# EAGLE board CT_schematic (EAGLE 7.6.0)

Size 100 x 80 mm. Coordinates in mm from the lower left corner, seen from the top.
Outline: 0,0 100,0 100,80 0,80 0,0
Copper layers (1*16): Top 0.035mm / dielectric 1.5mm / Bottom 0.035mm
Design rules "default": minimum track width 10mil, minimum drill 24mil, track to track 8mil, track to pad 8mil, pad to pad 8mil, via to via 8mil, smd to smd 8mil, copper to edge 40mil, drill to drill 8mil, minimum pad ring 10mil, minimum via ring 8mil, stop-mask expansion 4mil, vias tented up to drill 0mil, thermal gap 10mil

## Footprints (pad centres in the part's own frame; a part is rotated, then mirrored left to right if it is on the bottom)
C0603 = smd 0.8 x 0.8: 1 -0.762,0; 2 0.762,0
C0402 = smd 0.5 x 0.5: 1 -0.508,0; 2 0.508,0
2220 = smd 1.85 x 5.5: 1 -2.55,0; 2 2.55,0
C1210 = smd 1.2 x 2.5: 1 -1.524,0; 2 1.524,0
C1206 = smd 1.3 x 1.6: 1 -1.524,0; 2 1.524,0
L0603 = smd 0.8 x 0.8: 1 -0.762,0; 2 0.762,0
R0603 = smd 0.8 x 0.8: 1 -0.762,0; 2 0.762,0
LQFP100 = smd 0.3 x 1.2: 1 -6,-7.75; 2 -5.5,-7.75; 3 -5,-7.75; 4 -4.5,-7.75; 5 -4,-7.75; 6 -3.5,-7.75; 7 -3,-7.75; 8 -2.5,-7.75; 9 -2,-7.75; 10 -1.5,-7.75; 11 -1,-7.75; 12 -0.5,-7.75; 13 0,-7.75; 14 0.5,-7.75; 15 1,-7.75; 16 1.5,-7.75; 17 2,-7.75; 18 2.5,-7.75; 19 3,-7.75; 20 3.5,-7.75; 21 4,-7.75; 22 4.5,-7.75; 23 5,-7.75; 24 5.5,-7.75; 25 6,-7.75; 51 6,7.75; 52 5.5,7.75; 53 5,7.75; 54 4.5,7.75; 55 4,7.75; 56 3.5,7.75; 57 3,7.75; 58 2.5,7.75; 59 2,7.75; 60 1.5,7.75; 61 1,7.75; 62 0.5,7.75; 63 0,7.75; 64 -0.5,7.75; 65 -1,7.75; 66 -1.5,7.75; 67 -2,7.75; 68 -2.5,7.75; 69 -3,7.75; 70 -3.5,7.75; 71 -4,7.75; 72 -4.5,7.75; 73 -5,7.75; 74 -5.5,7.75; 75 -6,7.75 | smd 1.2 x 0.3: 26 7.75,-6; 27 7.75,-5.5; 28 7.75,-5; 29 7.75,-4.5; 30 7.75,-4; 31 7.75,-3.5; 32 7.75,-3; 33 7.75,-2.5; 34 7.75,-2; 35 7.75,-1.5; 36 7.75,-1; 37 7.75,-0.5; 38 7.75,0; 39 7.75,0.5; 40 7.75,1; 41 7.75,1.5; 42 7.75,2; 43 7.75,2.5; 44 7.75,3; 45 7.75,3.5; 46 7.75,4; 47 7.75,4.5; 48 7.75,5; 49 7.75,5.5; 50 7.75,6; 76 -7.75,6; 77 -7.75,5.5; 78 -7.75,5; 79 -7.75,4.5; 80 -7.75,4; 81 -7.75,3.5; 82 -7.75,3; 83 -7.75,2.5; 84 -7.75,2; 85 -7.75,1.5; 86 -7.75,1; 87 -7.75,0.5; 88 -7.75,0; 89 -7.75,-0.5; 90 -7.75,-1; 91 -7.75,-1.5; 92 -7.75,-2; 93 -7.75,-2.5; 94 -7.75,-3; 95 -7.75,-3.5; 96 -7.75,-4; 97 -7.75,-4.5; 98 -7.75,-5; 99 -7.75,-5.5; 100 -7.75,-6
SOIC-8 = smd 1.6 x 0.6: 1 -2.7,1.905 | smd 1.55 x 0.6: 2 -2.7,0.635; 3 -2.7,-0.635; 4 -2.7,-1.905; 5 2.7,-1.905; 6 2.7,-0.635; 7 2.7,0.635; 8 2.7,1.905
TDFN-8/6MM = smd 0.3 x 0.75: 1 0,0; 2 0.5,0; 3 1,0; 4 1.5,0; 5 1.5,3; 6 1,3; 7 0.5,3; 8 0,3
SON-8 = smd 0.35 x 0.85: 1 -0.975,-1.475; 2 -0.325,-1.475; 3 0.325,-1.475; 4 0.975,-1.475; 5 0.975,1.475; 6 0.325,1.475; 7 -0.325,1.475; 8 -0.975,1.475 | smd 2.4 x 1.65: PAD 0,0
QFN-32 = smd 0.6 x 0.3: 1 -2.3,1.75; 2 -2.3,1.25; 3 -2.3,0.75; 4 -2.3,0.25; 5 -2.3,-0.25; 6 -2.3,-0.75; 7 -2.3,-1.25; 8 -2.3,-1.75; 17 2.3,-1.75; 18 2.3,-1.25; 19 2.3,-0.75; 20 2.3,-0.25; 21 2.3,0.25; 22 2.3,0.75; 23 2.3,1.25; 24 2.3,1.75 | smd 0.3 x 0.6: 9 -1.75,-2.3; 10 -1.25,-2.3; 11 -0.75,-2.3; 12 -0.25,-2.3; 13 0.25,-2.3; 14 0.75,-2.3; 15 1.25,-2.3; 16 1.75,-2.3; 25 1.75,2.3; 26 1.25,2.3; 27 0.75,2.3; 28 0.25,2.3; 29 -0.25,2.3; 30 -0.75,2.3; 31 -1.25,2.3; 32 -1.75,2.3 | smd 3.2 x 3.2: EXP 0,0
SJ-43515TS-SMT-TR = smd 2.2 x 3: 1 0.6,-7.4; 4 3.4,-7.4 | smd 3 x 3: 2 12.8,-7.4; 5 17,-3 | smd 2 x 3: 3 5.3,0; 6 2.5,0 | drill 1.8: P$7 4.5,-3.69; P$8 11.54,-3.69
WM-64PC = drill 0.6 pad 1: 1 -1,0.95; 2 -1,-0.95
FCI_10118193-0001LF = smd 0.4 x 1.35: 1 -1.3,2.675; 2 -0.65,2.675; 3 0,2.675; 4 0.65,2.675; 5 1.3,2.675 | smd 1.6 x 1.4: 6 -3.2,2.45; 7 3.2,2.45 | smd 1.9 x 1.9: 8 -1.2,0; 9 1.2,0 | hole 0.5: -3.3,0; 3.3,0
SOT143B = smd 1 x 0.7: 1 -0.75,-1 | smd 0.6 x 0.7: 2 0.95,-1; 3 0.95,1; 4 -0.95,1
QFN-24 = smd 0.7 x 0.305: 1 -1.815,1.25; 2 -1.815,0.75; 3 -1.815,0.25; 4 -1.815,-0.25; 5 -1.815,-0.73; 6 -1.815,-1.25; 13 1.815,-1.25; 14 1.815,-0.75; 15 1.815,-0.25; 16 1.815,0.25; 17 1.815,0.75; 18 1.815,1.25 | smd 0.305 x 0.7: 7 -1.25,-1.815; 8 -0.75,-1.815; 9 -0.25,-1.815; 10 0.25,-1.815; 11 0.75,-1.815; 12 1.25,-1.815; 19 1.25,1.815; 20 0.75,1.815; 21 0.25,1.815; 22 -0.25,1.815; 23 -0.75,1.815; 24 -1.25,1.815 | smd 2.591 x 2.591: 25 0,0
ABS07-32.768KHZ-7-T = smd 1.1 x 2.4: 1 -2.5,0; 2 0,0
ASFL1 = smd 1.7 x 1.5: 1 -1.27,-1.1; 2 1.27,-1.1; 3 1.27,1.1; 4 -1.27,1.1
MSOP-8_EP = smd 1.422 x 0.508: 1 -2.095,0.975; 2 -2.095,0.325; 3 -2.095,-0.325; 4 -2.095,-0.975; 5 2.095,-0.975; 6 2.095,-0.325; 7 2.095,0.325; 8 2.095,0.975 | smd 1.727 x 1.702: EPAD 0,0
SOIC-8_EP = smd 1.6 x 0.533: 1 -2.921,1.905; 2 -2.921,0.635; 3 -2.921,-0.635; 4 -2.921,-1.905; 5 2.921,-1.905; 6 2.921,-0.635; 7 2.921,0.635; 8 2.921,1.905 | smd 2.54 x 3.302: EPAD 0,0 | drill 0.406 pad 0.406: P$1 -0.508,0.635; P$2 0.381,0.635; P$3 -0.508,-0.635; P$4 0.381,-0.635
DFN8_2X3MC = smd 0.813 x 0.305: 1 -1.398,0.75; 2 -1.398,0.25; 3 -1.398,-0.25; 4 -1.398,-0.75; 5 1.398,-0.75; 6 1.398,-0.25; 7 1.398,0.25; 8 1.398,0.75 | smd 1.753 x 1.549: 9 0,0
JST-2-SMD = smd 1 x 4.6: 1 -1,-3.7; 2 1,-3.7 | smd 1.6 x 3.4: NC1 -3.4,1.5; NC2 3.4,1.5
SON-6 = smd 0.55 x 0.3: 1 -0.355,0.5 | smd 0.52 x 0.3: 2 -0.37,0; 3 -0.37,-0.5; 4 0.37,-0.5; 5 0.37,0; 6 0.37,0.5
SW_4-1437565-2 = smd 1.4 x 2.1: 1 -2.23,4.55; 2 -2.23,-4.55; 3 2.23,4.55; 4 2.23,-4.55
LGM67K-G1J2-24-Z = smd 0.8 x 1.4: A -2,0; C 0,0
NC7SZ125M5X = smd 1.3 x 0.7: 1 -1.3,0.95; 2 -1.3,0; 3 -1.3,-0.95; 4 1.3,-0.95; 5 1.3,0.95

## Placement (x,y rotation side)
C1  1e-06  [C0603]  -39.37,74.93 0 top  (outside the outline)
C2  1e-07  [C0603]  -43.18,74.93 0 top  (outside the outline)
C3  1e-07  [C0603]  -46.99,74.93 0 top  (outside the outline)
C4  1e-07  [C0603]  -50.8,74.93 0 top  (outside the outline)
C5  1e-07  [C0603]  -54.61,74.93 0 top  (outside the outline)
C6  1e-07  [C0603]  -58.42,74.93 0 top  (outside the outline)
C7  1e-07  [C0603]  -62.23,74.93 0 top  (outside the outline)
C8  4.7e-06  [C0603]  -24.13,74.93 0 top  (outside the outline)
C9  2.2e-06  [C0603]  -27.94,74.93 0 top  (outside the outline)
C10  2.2e-06  [C0603]  -31.75,74.93 0 top  (outside the outline)
C11  1e-08  [C0603]  -66.04,74.93 0 top  (outside the outline)
C12  1e-06  [C0603]  -69.85,74.93 0 top  (outside the outline)
C13  1e-11  [C0402]  -26.67,85.09 0 top  (outside the outline)
C14  1e-11  [C0402]  -30.48,85.09 0 top  (outside the outline)
C15  1e-06  [C0603]  -73.66,74.93 0 top  (outside the outline)
C16  1e-08  [C0402]  -34.29,85.09 0 top  (outside the outline)
C17  1e-08  [C0402]  -38.1,85.09 0 top  (outside the outline)
C18  1e-07  [C0402]  -41.91,85.09 0 top  (outside the outline)
C19  1e-06  [C0603]  -77.47,74.93 0 top  (outside the outline)
C20  1e-06  [C0603]  -81.28,74.93 0 top  (outside the outline)
C21  1e-06  [C0603]  -85.09,74.93 0 top  (outside the outline)
C22  1e-06  [C0603]  -15.24,80.01 0 top  (outside the outline)
C23  1e-06  [C0603]  -19.05,80.01 0 top  (outside the outline)
C24  1e-06  [C0603]  -22.86,80.01 0 top  (outside the outline)
C25  1e-06  [C0603]  -26.67,80.01 0 top  (outside the outline)
C26  1e-07  [C0402]  -45.72,85.09 0 top  (outside the outline)
C27  1e-07  [C0402]  -49.53,85.09 0 top  (outside the outline)
C28  1e-07  [C0402]  -53.34,85.09 0 top  (outside the outline)
C29  1e-07  [C0402]  -57.15,85.09 0 top  (outside the outline)
C30  1e-06  [C0603]  -30.48,80.01 0 top  (outside the outline)
C31  1e-08  [C0402]  -60.96,85.09 0 top  (outside the outline)
C32  2.2e-06  [C0603]  -35.56,74.93 0 top  (outside the outline)
C33  1e-08  [C0402]  -64.77,85.09 0 top  (outside the outline)
C34  1e-08  [C0402]  -68.58,85.09 0 top  (outside the outline)
C35  1e-06  [C0603]  -34.29,80.01 0 top  (outside the outline)
C36  1e-08  [C0402]  -72.39,85.09 0 top  (outside the outline)
C37  1e-08  [C0402]  -76.2,85.09 0 top  (outside the outline)
C38  1e-08  [C0402]  -80.01,85.09 0 top  (outside the outline)
C39  6.8e-05  [2220]  -16.51,46.99 0 top  (outside the outline)
C40  1e-06  [C0603]  -38.1,80.01 0 top  (outside the outline)
C41  6.8e-05  [2220]  -24.13,46.99 0 top  (outside the outline)
C42  1e-05  [C1210]  -40.64,63.5 0 top  (outside the outline)
C43  1e-05  [C1210]  -46.99,63.5 0 top  (outside the outline)
C44  1e-05  [C1210]  -53.34,63.5 0 top  (outside the outline)
C45  1e-05  [C1210]  -59.69,63.5 0 top  (outside the outline)
C46  1e-07  [C0402]  -83.82,85.09 0 top  (outside the outline)
C47  1e-05  [C1206]  -66.04,63.5 0 top  (outside the outline)
C48  1e-05  [C1206]  -72.39,63.5 0 top  (outside the outline)
C49  1e-08  [C0402]  -15.24,90.17 0 top  (outside the outline)
C50  1e-08  [C0402]  -19.05,90.17 0 top  (outside the outline)
F1  240.0  [L0603]  -41.91,80.01 0 top  (outside the outline)
R2  1000.0  [R0603]  -45.72,80.01 0 top  (outside the outline)
R4  4700.0  [R0603]  -49.53,80.01 0 top  (outside the outline)
R5  4700.0  [R0603]  -53.34,80.01 0 top  (outside the outline)
R6  2200.0  [R0603]  -57.15,80.01 0 top  (outside the outline)
R7  2200.0  [R0603]  -60.96,80.01 0 top  (outside the outline)
R8  2200.0  [R0603]  -64.77,80.01 0 top  (outside the outline)
R9  2200.0  [R0603]  -68.58,80.01 0 top  (outside the outline)
R10  10000.0  [R0603]  -46.99,69.85 0 top  (outside the outline)
R11  10000.0  [R0603]  -52.07,69.85 0 top  (outside the outline)
R12  10000.0  [R0603]  -57.15,69.85 0 top  (outside the outline)
R13  10000.0  [R0603]  -62.23,69.85 0 top  (outside the outline)
R14  10000.0  [R0603]  -67.31,69.85 0 top  (outside the outline)
R15  1270.0  [R0603]  -72.39,80.01 0 top  (outside the outline)
R16  1270.0  [R0603]  -76.2,80.01 0 top  (outside the outline)
R17  8060.0  [R0603]  -80.01,80.01 0 top  (outside the outline)
R18  3900.0  [R0603]  -83.82,80.01 0 top  (outside the outline)
R19  2200.0  [R0603]  -15.24,85.09 0 top  (outside the outline)
R20  10000.0  [R0603]  -72.39,69.85 0 top  (outside the outline)
R21  4031.5447154472  [R0603]  -31.75,69.85 0 top  (outside the outline)
R22  2200.0  [R0603]  -19.05,85.09 0 top  (outside the outline)
R23  10000.0  [R0603]  -77.47,69.85 0 top  (outside the outline)
R24  10000.0  [R0603]  -82.55,69.85 0 top  (outside the outline)
R25  82000.0  [R0603]  -15.24,74.93 0 top  (outside the outline)
R26  300000.0  [R0603]  -36.83,69.85 0 top  (outside the outline)
R27  120000.0  [R0603]  -41.91,69.85 0 top  (outside the outline)
R28  2000.0  [R0603]  -22.86,85.09 0 top  (outside the outline)
R29  10000.0  [R0603]  -20.32,74.93 0 top  (outside the outline)
U1  STM32F777VIT6  [LQFP100]  -24.13,8.89 0 top  (outside the outline)
U2  AT25040B-SSHL-T  [SOIC-8]  -78.74,36.83 0 top  (outside the outline)
U3  24AA04-I/MC  [TDFN-8/6MM]  -63.5,35.56 0 top  (outside the outline)
U4  PCF85063TP/1Z  [SON-8]  -27.94,62.23 0 top  (outside the outline)
U5  SGTL5000XNAA3  [QFN-32]  -49.53,36.83 0 top  (outside the outline)
U6  SJ-43515TS-SMT-TR  [SJ-43515TS-SMT-TR]  -59.69,10.16 0 top  (outside the outline)
U7  SJ-43515TS-SMT-TR  [SJ-43515TS-SMT-TR]  -39.37,26.67 0 top  (outside the outline)
U8  SJ-43515TS-SMT-TR  [SJ-43515TS-SMT-TR]  -67.31,26.67 0 top  (outside the outline)
U9  WM-64PCT  [WM-64PC]  -35.56,36.83 0 top  (outside the outline)
U10  10118193-0001LF  [FCI_10118193-0001LF]  -19.05,54.61 0 top  (outside the outline)
U11  prtr5v0u2ax  [SOT143B]  -31.75,90.17 0 top  (outside the outline)
U12  USB3317C-CP-TR  [QFN-24]  -33.02,63.5 0 top  (outside the outline)
U13  10118193-0001LF  [FCI_10118193-0001LF]  -29.21,54.61 0 top  (outside the outline)
U14  prtr5v0u2ax  [SOT143B]  -44.45,90.17 0 top  (outside the outline)
U15  ABS07-32.768KHZ-7-T  [ABS07-32.768KHZ-7-T]  -49.53,55.88 0 top  (outside the outline)
U16  ABS07-32.768KHZ-7-T  [ABS07-32.768KHZ-7-T]  -68.58,55.88 0 top  (outside the outline)
U17  ASFL-24.57MHZ-NCS  [ASFL1]  -43.18,46.99 0 top  (outside the outline)
U18  ASFL1-25MHZ-NCS  [ASFL1]  -59.69,46.99 0 top  (outside the outline)
U19  ASFL1-26MHZ-NCS  [ASFL1]  -76.2,46.99 0 top  (outside the outline)
U20  MIC47100YMME  [MSOP-8_EP]  -78.74,62.23 0 top  (outside the outline)
U21  MIC5234YME  [SOIC-8_EP]  -77.47,54.61 0 top  (outside the outline)
U22  MCP73831T-2ACI/MC  [DFN8_2X3MC]  -54.61,88.9 0 top  (outside the outline)
U23  S2B-PH-SM4-TB(LF)(SN)  [JST-2-SMD]  -22.86,38.1 0 top  (outside the outline)
U24  TPS3895ADRYR  [SON-6]  -48.26,88.9 0 top  (outside the outline)
U25  4-1437565-2  [SW_4-1437565-2]  -83.82,24.13 0 top  (outside the outline)
U26  Q65110A2395  [LGM67K-G1J2-24-Z]  -17.78,63.5 0 top  (outside the outline)
U27  nc7sz125m5x  [NC7SZ125M5X]  -15.24,68.58 0 top  (outside the outline)
U28  nc7sz125m5x  [NC7SZ125M5X]  -21.59,68.58 0 top  (outside the outline)

## Library data of the parts
C1-C50 F1 R2 R4-R29 U1-U28 = circuit_tree

## Nets
CLK_CRYSTAL_U1_8: C13.1 U1.8 U16.1
CLK_CRYSTAL_U1_9: C14.1 U1.9 U16.2
CLK_CRYSTAL_U4_1: U4.1 U15.1
CLK_CRYSTAL_U4_2: U4.2 U15.2
CLK_U1_12: U1.12 U18.3
CLK_U5_21: U5.21 U17.3
CLK_U12_23: U12.23 U19.3
GND: C1.2 C2.2 C3.2 C4.2 C5.2 C6.2 C7.2 C8.2 C9.2 C10.2 C11.2 C12.2 C13.2 C14.2 C15.2 C16.2 C17.2 C18.2 C26.2 C27.2 C28.2 C29.2 C30.2 C31.2 C32.2 C33.2 C34.2 C35.2 C36.2 C37.2 C38.2 C39.2 C40.2 C41.2 C42.2 C43.2 C44.2 C45.2 C46.2 C47.2 C48.2 C49.2 C50.2 R2.2 R10.2 R16.2 R17.2 R19.2 R22.2 R25.2 R27.2 R28.2 U1.10 U1.19 U1.26 U1.49 U1.70 U1.74 U1.99 U2.4 U3.4 U4.4 U4.PAD U5.1 U5.3 U5.7 U5.EXP U7.1 U8.1 U9.2 U10.5 U10.6 U10.7 U10.8 U10.9 U11.1 U12.25 U13.5 U13.6 U13.7 U13.8 U13.9 U14.1 U17.2 U18.2 U19.2 U20.3 U20.EPAD U21.7 U21.EPAD U22.6 U22.9 U23.2 U24.2 U26.C U27.1 U27.3 U28.1 U28.3
INPUT_USBPOWER_5V: C15.1 C47.1 R29.2 U1.68 U10.1 U11.4 U22.1 U22.2
NET_U1_14: R4.1 U1.14 U27.4
NET_U1_21: C11.1 C12.1 F1.1 U1.20 U1.21
NET_U1_48: C9.1 U1.48
NET_U1_66: R9.1 U1.66 U3.5
NET_U1_67: R8.1 U1.67 U3.6
NET_U1_73: C10.1 U1.73
NET_U1_92: R6.1 U1.92 U4.6
NET_U1_93: R7.1 U1.93 U4.5
NET_U1_94: R10.1 U1.94
NET_U1_97: U26.A
NET_U1_98: U25.3 U25.4
NET_U2_3: R11.1 U2.3
NET_U2_7: R13.1 U2.7
NET_U4_3: R14.1 U4.3
NET_U5_10: C29.1 U5.10
NET_U5_29: R15.1 U5.29
NET_U5_31: R16.1 U5.31
NET_U6_1: U5.4 U6.1
NET_U6_2: U5.2 U6.2
NET_U6_5: U5.6 U6.5
NET_U7_2: C20.1 U7.2
NET_U7_5: C19.1 U7.5
NET_U7_11: C20.2
NET_U7_12: C19.2
NET_U8_2: C22.1 C23.1 U8.2
NET_U8_5: C21.1 U8.5
NET_U8_13: C22.2 C23.2
NET_U8_14: C21.2
NET_U9_1: C24.1 C25.1 C30.1 U5.16 U9.1
NET_U9_15: C24.2 C25.2
NET_U12_4: C32.1 U12.4
NET_U12_22: R5.1 U12.22 U28.4
NET_U12_24: R17.1 U12.24
NET_U13_1: C35.1 U12.2 U13.1 U14.4
NET_U13_2: U12.5 U13.2 U14.3
NET_U13_3: U12.6 U13.3 U14.2
NET_U20_6: R18.2 R19.1 U20.6
NET_U21_4: R21.2 R22.1 U21.4
NET_U22_5: R29.1 U22.5
NET_U22_8: R28.1 U22.8
NET_U24_1: R24.1 R25.1 U24.1
NET_U24_3: R26.2 R27.1 U24.3
NET_U24_4: R23.1 U24.4 U27.2 U28.2
NET_U25_1: R2.1 U25.1 U25.2
PROC_I2S2_CK: U1.84 U5.24
PROC_I2S2_SD: U1.16 U5.26
PROC_I2S2_WS: U1.90 U5.23
PROC_SPI1_MISO: U1.30 U2.2
PROC_SPI1_MOSI: U1.31 U2.5
PROC_SPI1_NSS: R12.1 U1.28 U2.1
PROC_SPI1_SCK: U1.89 U2.6
PROC_USB_OTG_FS_DM: U1.70 U10.2 U11.3
PROC_USB_OTG_FS_DP: U1.71 U10.3 U11.2
PROC_USB_OTG_HS_ULPI_CK: U1.29 U12.12
PROC_USB_OTG_HS_ULPI_D0: U1.25 U12.16
PROC_USB_OTG_HS_ULPI_D1: U1.34 U12.15
PROC_USB_OTG_HS_ULPI_D2: U1.35 U12.14
PROC_USB_OTG_HS_ULPI_D3: U1.46 U12.13
PROC_USB_OTG_HS_ULPI_D4: U1.47 U12.11
PROC_USB_OTG_HS_ULPI_D5: U1.51 U12.10
PROC_USB_OTG_HS_ULPI_D6: U1.52 U12.9
PROC_USB_OTG_HS_ULPI_D7: U1.91 U12.8
PROC_USB_OTG_HS_ULPI_DIR: U1.17 U12.19
PROC_USB_OTG_HS_ULPI_NXT: U1.18 U12.18
PROC_USB_OTG_HS_ULPI_STP: U1.15 U12.20
VCC_S1_3V7: C39.1 C40.1 C42.1 C43.1 C48.1 R20.1 R20.2 U20.1 U20.2 U20.4 U20.5 U21.5 U21.8 U22.3 U22.4 U23.1
VCC_TIER1_1V8: C1.1 C2.1 C3.1 C4.1 C5.1 C6.1 C7.1 C8.1 C16.1 C17.1 C18.1 C26.1 C27.1 C28.1 C33.1 C34.1 C41.1 C46.1 C49.1 C50.1 F1.2 R4.2 R5.2 R6.2 R7.2 R8.2 R9.2 R11.2 R12.2 R13.2 R14.2 R15.2 R18.1 R23.2 R24.2 R26.1 U1.6 U1.11 U1.27 U1.50 U1.75 U1.100 U2.8 U3.7 U3.8 U4.8 U5.5 U5.20 U5.30 U12.17 U12.21 U20.7 U20.8 U24.6 U27.5 U28.5
VCC_TIER1_3V3: C31.1 C36.1 C37.1 C38.1 C44.1 C45.1 R21.1 U12.3 U17.4 U18.4 U19.4 U21.1

## Tracks (layer width: path | path; a pad name or v marks a point on that pad's centre or on a via)
CLK_CRYSTAL_U1_8  (2 unrouted)
CLK_CRYSTAL_U1_9  (2 unrouted)
CLK_CRYSTAL_U4_1  (1 unrouted)
CLK_CRYSTAL_U4_2  (1 unrouted)
CLK_U1_12  (1 unrouted)
CLK_U5_21  (1 unrouted)
CLK_U12_23  (1 unrouted)
GND  (98 unrouted)
INPUT_USBPOWER_5V  (7 unrouted)
NET_U1_14  (2 unrouted)
NET_U1_21  (4 unrouted)
NET_U1_48  (1 unrouted)
NET_U1_66  (2 unrouted)
NET_U1_67  (2 unrouted)
NET_U1_73  (1 unrouted)
NET_U1_92  (2 unrouted)
NET_U1_93  (2 unrouted)
NET_U1_94  (1 unrouted)
NET_U1_98  (1 unrouted)
NET_U2_3  (1 unrouted)
NET_U2_7  (1 unrouted)
NET_U4_3  (1 unrouted)
NET_U5_10  (1 unrouted)
NET_U5_29  (1 unrouted)
NET_U5_31  (1 unrouted)
NET_U6_1  (1 unrouted)
NET_U6_2  (1 unrouted)
NET_U6_5  (1 unrouted)
NET_U7_2  (1 unrouted)
NET_U7_5  (1 unrouted)
NET_U8_2  (2 unrouted)
NET_U8_5  (1 unrouted)
NET_U8_13  (1 unrouted)
NET_U9_1  (4 unrouted)
NET_U9_15  (1 unrouted)
NET_U12_4  (1 unrouted)
NET_U12_22  (2 unrouted)
NET_U12_24  (1 unrouted)
NET_U13_1  (3 unrouted)
NET_U13_2  (2 unrouted)
NET_U13_3  (2 unrouted)
NET_U20_6  (2 unrouted)
NET_U21_4  (2 unrouted)
NET_U22_5  (1 unrouted)
NET_U22_8  (1 unrouted)
NET_U24_1  (2 unrouted)
NET_U24_3  (2 unrouted)
NET_U24_4  (3 unrouted)
NET_U25_1  (2 unrouted)
PROC_I2S2_CK  (1 unrouted)
PROC_I2S2_SD  (1 unrouted)
PROC_I2S2_WS  (1 unrouted)
PROC_SPI1_MISO  (1 unrouted)
PROC_SPI1_MOSI  (1 unrouted)
PROC_SPI1_NSS  (2 unrouted)
PROC_SPI1_SCK  (1 unrouted)
PROC_USB_OTG_FS_DM  (2 unrouted)
PROC_USB_OTG_FS_DP  (2 unrouted)
PROC_USB_OTG_HS_ULPI_CK  (1 unrouted)
PROC_USB_OTG_HS_ULPI_D0  (1 unrouted)
PROC_USB_OTG_HS_ULPI_D1  (1 unrouted)
PROC_USB_OTG_HS_ULPI_D2  (1 unrouted)
PROC_USB_OTG_HS_ULPI_D3  (1 unrouted)
PROC_USB_OTG_HS_ULPI_D4  (1 unrouted)
PROC_USB_OTG_HS_ULPI_D5  (1 unrouted)
PROC_USB_OTG_HS_ULPI_D6  (1 unrouted)
PROC_USB_OTG_HS_ULPI_D7  (1 unrouted)
PROC_USB_OTG_HS_ULPI_DIR  (1 unrouted)
PROC_USB_OTG_HS_ULPI_NXT  (1 unrouted)
PROC_USB_OTG_HS_ULPI_STP  (1 unrouted)
VCC_S1_3V7  (15 unrouted)
VCC_TIER1_1V8  (55 unrouted)
VCC_TIER1_3V3  (11 unrouted)